# EAGLE board LedBoardPanel (EAGLE 6.4)
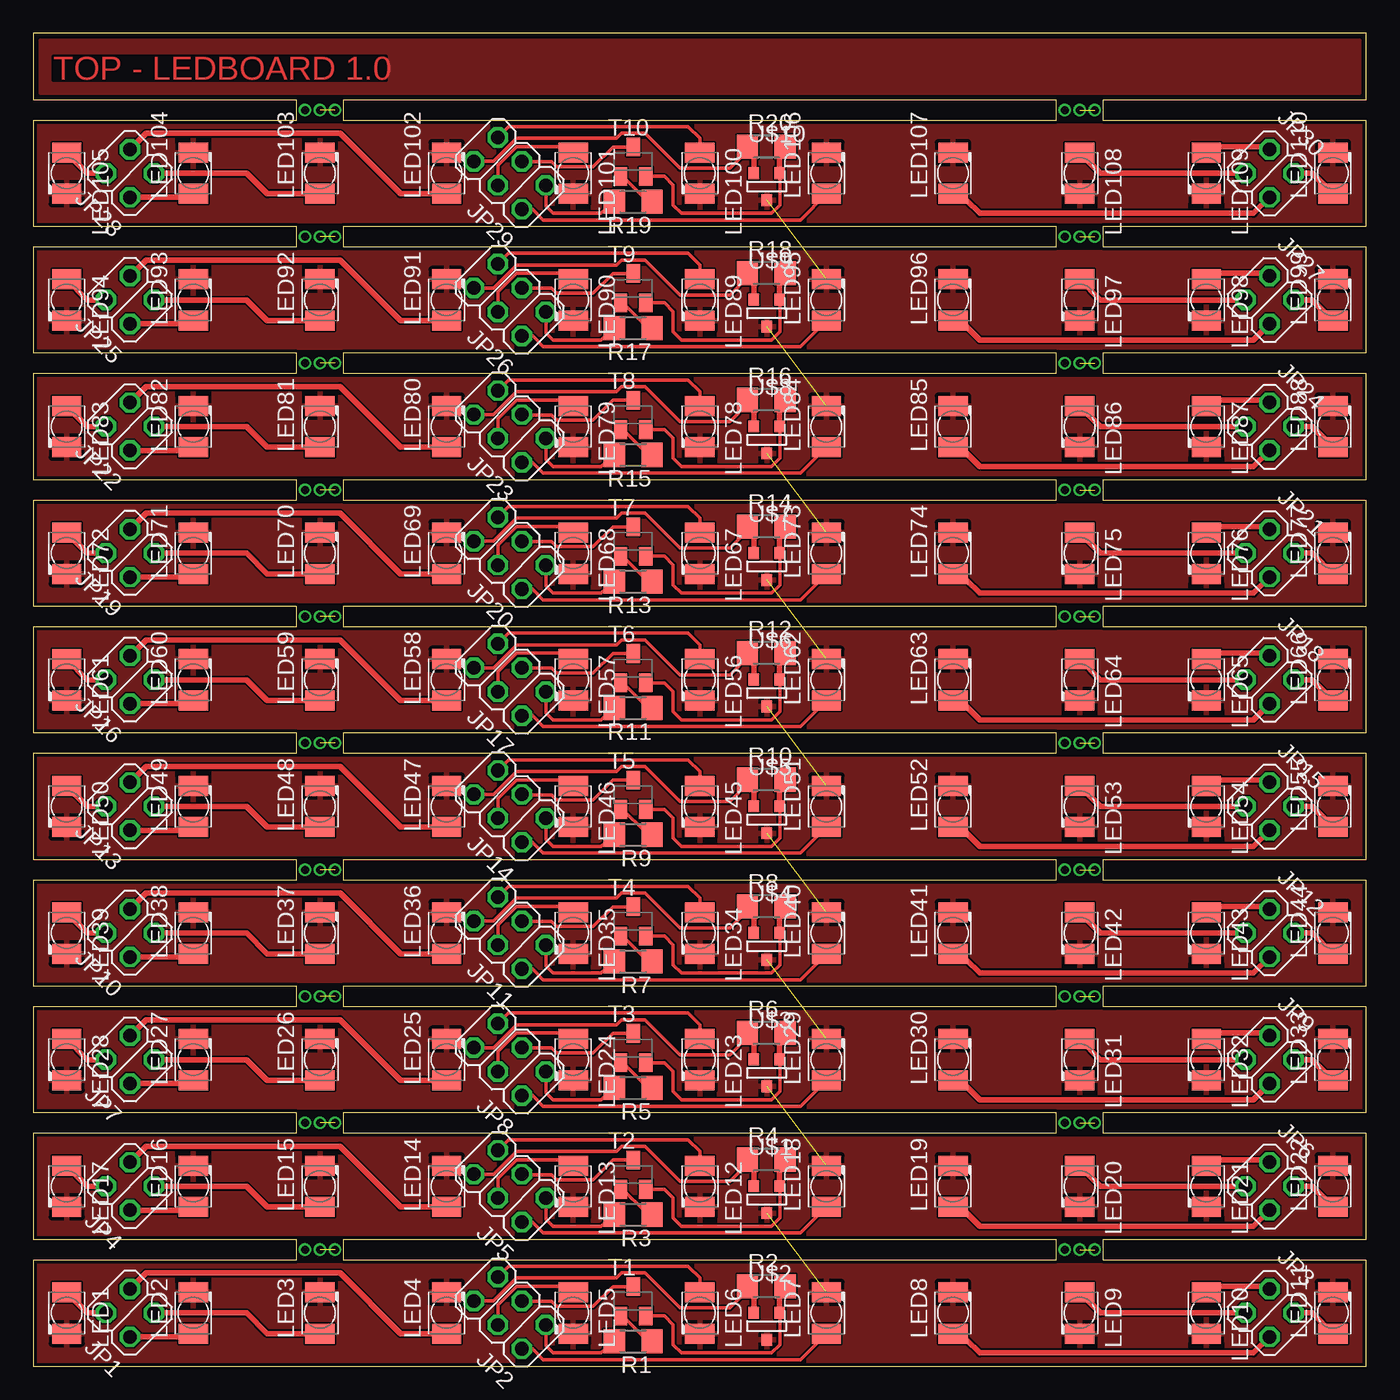
[diagram p0: board, top side]

Size 100 x 100 mm. Coordinates in mm from the lower left corner, seen from the top.
Outline: 0,0 100,0 100,8 80.25,8 80.25,9.5 100,9.5 100,17.5 80.25,17.5 80.25,19 100,19 100,27 80.25,27 80.25,28.5 100,28.5 100,36.5 80.25,36.5 80.25,38 100,38 100,46 80.25,46 80.25,47.5 100,47.5 100,55.5 80.25,55.5 80.25,57 100,57 100,65 80.25,65 80.25,66.5 100,66.5 100,74.5 80.25,74.5 80.25,76 100,76 100,84 80.25,84 80.25,85.5 100,85.5 100,93.5 80.25,93.5 80.25,95 100,95 100,100 0,100 0,95 19.75,95 19.75,93.5 0,93.5 0,85.5 19.75,85.5 19.75,84 0,84 0,76 19.75,76 19.75,74.5 0,74.5 0,66.5 19.75,66.5 19.75,65 0,65 0,57 19.75,57 19.75,55.5 0,55.5 0,47.5 19.75,47.5 19.75,46 0,46 0,38 19.75,38 19.75,36.5 0,36.5 0,28.5 19.75,28.5 19.75,27 0,27 0,19 19.75,19 19.75,17.5 0,17.5 0,9.5 19.75,9.5 19.75,8 0,8 0,0
Outline: 23.25,9.5 23.25,8 76.75,8 76.75,9.5 23.25,9.5
Outline: 23.25,19 23.25,17.5 76.75,17.5 76.75,19 23.25,19
Outline: 23.25,28.5 23.25,27 76.75,27 76.75,28.5 23.25,28.5
Outline: 23.25,38 23.25,36.5 76.75,36.5 76.75,38 23.25,38
Outline: 23.25,47.5 23.25,46 76.75,46 76.75,47.5 23.25,47.5
Outline: 23.25,57 23.25,55.5 76.75,55.5 76.75,57 23.25,57
Outline: 23.25,66.5 23.25,65 76.75,65 76.75,66.5 23.25,66.5
Outline: 23.25,76 23.25,74.5 76.75,74.5 76.75,76 23.25,76
Outline: 23.25,85.5 23.25,84 76.75,84 76.75,85.5 23.25,85.5
Outline: 23.25,95 23.25,93.5 76.75,93.5 76.75,95 23.25,95
Copper layers (1*16): Top 0.035mm / dielectric 1.5mm / Bottom 0.035mm
Design rules "dirt_cheap_dirty_boards.v1": minimum track width 5mil, minimum drill 12mil, track to track 5mil, track to pad 5mil, pad to pad 5mil, via to via 5mil, smd to smd 0mil, copper to edge 10mil, drill to drill 10mil, minimum pad ring 10mil, minimum via ring 6mil, stop-mask expansion 2mil, vias tented up to drill 25mil, thermal gap 10mil
tRestrict: area 19.5,7.9 to 23.5,9.6; area 76.5,7.9 to 80.5,9.6; area 19.5,17.4 to 23.5,19.1; area 76.5,17.4 to 80.5,19.1; area 19.5,26.9 to 23.5,28.6; area 76.5,26.9 to 80.5,28.6; area 19.5,36.4 to 23.5,38.1; area 76.5,36.4 to 80.5,38.1; area 19.5,45.9 to 23.5,47.6; area 76.5,45.9 to 80.5,47.6; area 19.5,55.4 to 23.5,57.1; area 76.5,55.4 to 80.5,57.1; area 19.5,64.9 to 23.5,66.6; area 76.5,64.9 to 80.5,66.6; area 19.5,74.4 to 23.5,76.1; area 76.5,74.4 to 80.5,76.1; area 19.5,83.9 to 23.5,85.6; area 76.5,83.9 to 80.5,85.6; area 19.5,93.4 to 23.5,95.1; area 76.5,93.4 to 80.5,95.1

## Footprints (pad centres in the part's own frame; a part is rotated, then mirrored left to right if it is on the bottom)
2X02 = drill 1.016 octagon: 1 -1.27,-1.27; 2 -1.27,1.27; 3 1.27,-1.27; 4 1.27,1.27
2X03 = drill 1.016 octagon: 1 -2.54,-1.27; 2 -2.54,1.27; 3 0,-1.27; 4 0,1.27; 5 2.54,-1.27; 6 2.54,1.27
KA-3528ASYC = smd 1.5 x 2.2: A -1.55,0; C 1.55,0
R1206 = smd 1.6 x 1.803: 1 -1.422,0; 2 1.422,0
SOT23-BEC = smd 1 x 1.4: B -0.95,-1.1; C 0,1.1; E 0.95,-1.1
SOT-23 = smd 0.787 x 0.889: 1 0.991,1.016; 2 -0.94,1.016; 3 0.025,-1.016

## Placement (x,y rotation side)
JP1  [2X02]  7.25,4 135 top
JP2  [2X03]  35.75,4 135 top
JP3  [2X02]  92.75,4 315 top
JP4  [2X02]  7.25,13.5 135 top
JP5  [2X03]  35.75,13.5 135 top
JP6  [2X02]  92.75,13.5 315 top
JP7  [2X02]  7.25,23 135 top
JP8  [2X03]  35.75,23 135 top
JP9  [2X02]  92.75,23 315 top
JP10  [2X02]  7.25,32.5 135 top
JP11  [2X03]  35.75,32.5 135 top
JP12  [2X02]  92.75,32.5 315 top
JP13  [2X02]  7.25,42 135 top
JP14  [2X03]  35.75,42 135 top
JP15  [2X02]  92.75,42 315 top
JP16  [2X02]  7.25,51.5 135 top
JP17  [2X03]  35.75,51.5 135 top
JP18  [2X02]  92.75,51.5 315 top
JP19  [2X02]  7.25,61 135 top
JP20  [2X03]  35.75,61 135 top
JP21  [2X02]  92.75,61 315 top
JP22  [2X02]  7.25,70.5 135 top
JP23  [2X03]  35.75,70.5 135 top
JP24  [2X02]  92.75,70.5 315 top
JP25  [2X02]  7.25,80 135 top
JP26  [2X03]  35.75,80 135 top
JP27  [2X02]  92.75,80 315 top
JP28  [2X02]  7.25,89.5 135 top
JP29  [2X03]  35.75,89.5 135 top
JP30  [2X02]  92.75,89.5 315 top
LED1  [KA-3528ASYC]  2.5,4 270 top
LED2  [KA-3528ASYC]  12,4 90 top
LED3  [KA-3528ASYC]  21.5,4 90 top
LED4  [KA-3528ASYC]  31,4 90 top
LED5  [KA-3528ASYC]  40.5,4 270 top
LED6  [KA-3528ASYC]  50,4 270 top
LED7  [KA-3528ASYC]  59.5,4 90 top
LED8  [KA-3528ASYC]  69,4 90 top
LED9  [KA-3528ASYC]  78.5,4 270 top
LED10  [KA-3528ASYC]  88,4 270 top
LED11  [KA-3528ASYC]  97.5,4 90 top
LED12  [KA-3528ASYC]  50,13.5 270 top
LED13  [KA-3528ASYC]  40.5,13.5 270 top
LED14  [KA-3528ASYC]  31,13.5 90 top
LED15  [KA-3528ASYC]  21.5,13.5 90 top
LED16  [KA-3528ASYC]  12,13.5 90 top
LED17  [KA-3528ASYC]  2.5,13.5 270 top
LED18  [KA-3528ASYC]  59.5,13.5 90 top
LED19  [KA-3528ASYC]  69,13.5 90 top
LED20  [KA-3528ASYC]  78.5,13.5 270 top
LED21  [KA-3528ASYC]  88,13.5 270 top
LED22  [KA-3528ASYC]  97.5,13.5 90 top
LED23  [KA-3528ASYC]  50,23 270 top
LED24  [KA-3528ASYC]  40.5,23 270 top
LED25  [KA-3528ASYC]  31,23 90 top
LED26  [KA-3528ASYC]  21.5,23 90 top
LED27  [KA-3528ASYC]  12,23 90 top
LED28  [KA-3528ASYC]  2.5,23 270 top
LED29  [KA-3528ASYC]  59.5,23 90 top
LED30  [KA-3528ASYC]  69,23 90 top
LED31  [KA-3528ASYC]  78.5,23 270 top
LED32  [KA-3528ASYC]  88,23 270 top
LED33  [KA-3528ASYC]  97.5,23 90 top
LED34  [KA-3528ASYC]  50,32.5 270 top
LED35  [KA-3528ASYC]  40.5,32.5 270 top
LED36  [KA-3528ASYC]  31,32.5 90 top
LED37  [KA-3528ASYC]  21.5,32.5 90 top
LED38  [KA-3528ASYC]  12,32.5 90 top
LED39  [KA-3528ASYC]  2.5,32.5 270 top
LED40  [KA-3528ASYC]  59.5,32.5 90 top
LED41  [KA-3528ASYC]  69,32.5 90 top
LED42  [KA-3528ASYC]  78.5,32.5 270 top
LED43  [KA-3528ASYC]  88,32.5 270 top
LED44  [KA-3528ASYC]  97.5,32.5 90 top
LED45  [KA-3528ASYC]  50,42 270 top
LED46  [KA-3528ASYC]  40.5,42 270 top
LED47  [KA-3528ASYC]  31,42 90 top
LED48  [KA-3528ASYC]  21.5,42 90 top
LED49  [KA-3528ASYC]  12,42 90 top
LED50  [KA-3528ASYC]  2.5,42 270 top
LED51  [KA-3528ASYC]  59.5,42 90 top
LED52  [KA-3528ASYC]  69,42 90 top
LED53  [KA-3528ASYC]  78.5,42 270 top
LED54  [KA-3528ASYC]  88,42 270 top
LED55  [KA-3528ASYC]  97.5,42 90 top
LED56  [KA-3528ASYC]  50,51.5 270 top
LED57  [KA-3528ASYC]  40.5,51.5 270 top
LED58  [KA-3528ASYC]  31,51.5 90 top
LED59  [KA-3528ASYC]  21.5,51.5 90 top
LED60  [KA-3528ASYC]  12,51.5 90 top
LED61  [KA-3528ASYC]  2.5,51.5 270 top
LED62  [KA-3528ASYC]  59.5,51.5 90 top
LED63  [KA-3528ASYC]  69,51.5 90 top
LED64  [KA-3528ASYC]  78.5,51.5 270 top
LED65  [KA-3528ASYC]  88,51.5 270 top
LED66  [KA-3528ASYC]  97.5,51.5 90 top
LED67  [KA-3528ASYC]  50,61 270 top
LED68  [KA-3528ASYC]  40.5,61 270 top
LED69  [KA-3528ASYC]  31,61 90 top
LED70  [KA-3528ASYC]  21.5,61 90 top
LED71  [KA-3528ASYC]  12,61 90 top
LED72  [KA-3528ASYC]  2.5,61 270 top
LED73  [KA-3528ASYC]  59.5,61 90 top
LED74  [KA-3528ASYC]  69,61 90 top
LED75  [KA-3528ASYC]  78.5,61 270 top
LED76  [KA-3528ASYC]  88,61 270 top
LED77  [KA-3528ASYC]  97.5,61 90 top
LED78  [KA-3528ASYC]  50,70.5 270 top
LED79  [KA-3528ASYC]  40.5,70.5 270 top
LED80  [KA-3528ASYC]  31,70.5 90 top
LED81  [KA-3528ASYC]  21.5,70.5 90 top
LED82  [KA-3528ASYC]  12,70.5 90 top
LED83  [KA-3528ASYC]  2.5,70.5 270 top
LED84  [KA-3528ASYC]  59.5,70.5 90 top
LED85  [KA-3528ASYC]  69,70.5 90 top
LED86  [KA-3528ASYC]  78.5,70.5 270 top
LED87  [KA-3528ASYC]  88,70.5 270 top
LED88  [KA-3528ASYC]  97.5,70.5 90 top
LED89  [KA-3528ASYC]  50,80 270 top
LED90  [KA-3528ASYC]  40.5,80 270 top
LED91  [KA-3528ASYC]  31,80 90 top
LED92  [KA-3528ASYC]  21.5,80 90 top
LED93  [KA-3528ASYC]  12,80 90 top
LED94  [KA-3528ASYC]  2.5,80 270 top
LED95  [KA-3528ASYC]  59.5,80 90 top
LED96  [KA-3528ASYC]  69,80 90 top
LED97  [KA-3528ASYC]  78.5,80 270 top
LED98  [KA-3528ASYC]  88,80 270 top
LED99  [KA-3528ASYC]  97.5,80 90 top
LED100  [KA-3528ASYC]  50,89.5 270 top
LED101  [KA-3528ASYC]  40.5,89.5 270 top
LED102  [KA-3528ASYC]  31,89.5 90 top
LED103  [KA-3528ASYC]  21.5,89.5 90 top
LED104  [KA-3528ASYC]  12,89.5 90 top
LED105  [KA-3528ASYC]  2.5,89.5 270 top
LED106  [KA-3528ASYC]  59.5,89.5 90 top
LED107  [KA-3528ASYC]  69,89.5 90 top
LED108  [KA-3528ASYC]  78.5,89.5 270 top
LED109  [KA-3528ASYC]  88,89.5 270 top
LED110  [KA-3528ASYC]  97.5,89.5 90 top
R1  10k  [R1206]  45,1.88 180 top
R2  10k  [R1206]  55,6 0 top
R3  10k  [R1206]  45,11.38 180 top
R4  10k  [R1206]  55,15.5 0 top
R5  10k  [R1206]  45,20.88 180 top
R6  10k  [R1206]  55,25 0 top
R7  10k  [R1206]  45,30.38 180 top
R8  10k  [R1206]  55,34.5 0 top
R9  10k  [R1206]  45,39.88 180 top
R10  10k  [R1206]  55,44 0 top
R11  10k  [R1206]  45,49.38 180 top
R12  10k  [R1206]  55,53.5 0 top
R13  10k  [R1206]  45,58.88 180 top
R14  10k  [R1206]  55,63 0 top
R15  10k  [R1206]  45,68.38 180 top
R16  10k  [R1206]  55,72.5 0 top
R17  10k  [R1206]  45,77.88 180 top
R18  10k  [R1206]  55,82 0 top
R19  10k  [R1206]  45,87.38 180 top
R20  10k  [R1206]  55,91.5 0 top
T1  [SOT23-BEC]  45,4.88 0 top
T2  [SOT23-BEC]  45,14.38 0 top
T3  [SOT23-BEC]  45,23.88 0 top
T4  [SOT23-BEC]  45,33.38 0 top
T5  [SOT23-BEC]  45,42.88 0 top
T6  [SOT23-BEC]  45,52.38 0 top
T7  [SOT23-BEC]  45,61.88 0 top
T8  [SOT23-BEC]  45,71.38 0 top
T9  [SOT23-BEC]  45,80.88 0 top
T10  [SOT23-BEC]  45,90.38 0 top
U$1  IRLML6402  [SOT-23]  55,12.5 0 top
U$2  IRLML6402  [SOT-23]  55,3 0 top
U$3  IRLML6402  [SOT-23]  55,22 0 top
U$4  IRLML6402  [SOT-23]  55,31.5 0 top
U$5  IRLML6402  [SOT-23]  55,41 0 top
U$6  IRLML6402  [SOT-23]  55,50.5 0 top
U$7  IRLML6402  [SOT-23]  55,60 0 top
U$8  IRLML6402  [SOT-23]  55,69.5 0 top
U$9  IRLML6402  [SOT-23]  55,79 0 top
U$10  IRLML6402  [SOT-23]  55,88.5 0 top

## Library data of the parts
JP1-JP30 = pinhead
LED1-LED110 = led
R1-R20 = resistor
T1-T10 = transistor
U$1-U$10 = IRLML6402

## Nets
GND: LED1.C LED2.C LED3.C LED4.C LED5.C LED6.C LED7.C LED8.C LED9.C LED10.C LED11.C LED12.C LED13.C LED14.C LED15.C LED16.C LED17.C LED18.C LED19.C LED20.C LED21.C LED22.C LED23.C LED24.C LED25.C LED26.C LED27.C LED28.C LED29.C LED30.C LED31.C LED32.C LED33.C LED34.C LED35.C LED36.C LED37.C LED38.C LED39.C LED40.C LED41.C LED42.C LED43.C LED44.C LED45.C LED46.C LED47.C LED48.C LED49.C LED50.C LED51.C LED52.C LED53.C LED54.C LED55.C LED56.C LED57.C LED58.C LED59.C LED60.C LED61.C LED62.C LED63.C LED64.C LED65.C LED66.C LED67.C LED68.C LED69.C LED70.C LED71.C LED72.C LED73.C LED74.C LED75.C LED76.C LED77.C LED78.C LED79.C LED80.C LED81.C LED82.C LED83.C LED84.C LED85.C LED86.C LED87.C LED88.C LED89.C LED90.C LED91.C LED92.C LED93.C LED94.C LED95.C LED96.C LED97.C LED98.C LED99.C LED100.C LED101.C LED102.C LED103.C LED104.C LED105.C LED106.C LED107.C LED108.C LED109.C LED110.C U$1.3 U$2.3 U$3.3 U$4.3 U$5.3 U$6.3 U$7.3 U$8.3 U$9.3 U$10.3
GND_TRANS: JP2.3 T1.C
GND_TRANS1: JP5.3 T2.C
GND_TRANS2: JP8.3 T3.C
GND_TRANS3: JP11.3 T4.C
GND_TRANS4: JP14.3 T5.C
GND_TRANS5: JP17.3 T6.C
GND_TRANS6: JP20.3 T7.C
GND_TRANS7: JP23.3 T8.C
GND_TRANS8: JP26.3 T9.C
GND_TRANS9: JP29.3 T10.C
N$1: JP1.4 LED1.A
N$2: R2.2 T1.E U$2.1
N$3: JP1.2 LED2.A
N$4: JP1.1 LED3.A
N$5: JP1.3 LED4.A
N$6: JP2.4 LED5.A
N$7: JP2.5 LED6.A
N$8: JP3.4 LED11.A
N$9: JP2.6 R2.1 U$2.2
N$10: R1.1 T1.B
N$11: JP3.2 LED10.A
N$12: JP3.1 LED9.A
N$13: JP3.3 LED8.A
N$14: JP2.2 LED7.A
N$15: JP2.1 R1.2
N$16: R4.2 T2.E U$1.1
N$17: R3.1 T2.B
N$18: JP5.1 R3.2
N$19: JP5.6 R4.1 U$1.2
N$20: JP4.4 LED17.A
N$21: JP4.2 LED16.A
N$22: JP4.1 LED15.A
N$23: JP4.3 LED14.A
N$24: JP5.4 LED13.A
N$25: JP5.5 LED12.A
N$26: JP6.4 LED22.A
N$27: JP6.2 LED21.A
N$28: JP6.1 LED20.A
N$29: JP6.3 LED19.A
N$30: JP5.2 LED18.A
N$31: R6.2 T3.E U$3.1
N$32: R5.1 T3.B
N$33: JP8.1 R5.2
N$34: JP8.6 R6.1 U$3.2
N$35: JP7.4 LED28.A
N$36: JP7.2 LED27.A
N$37: JP7.1 LED26.A
N$38: JP7.3 LED25.A
N$39: JP8.4 LED24.A
N$40: JP8.5 LED23.A
N$41: JP9.4 LED33.A
N$42: JP9.2 LED32.A
N$43: JP9.1 LED31.A
N$44: JP9.3 LED30.A
N$45: JP8.2 LED29.A
N$46: R8.2 T4.E U$4.1
N$47: R7.1 T4.B
N$48: JP11.1 R7.2
N$49: JP11.6 R8.1 U$4.2
N$50: JP10.4 LED39.A
N$51: JP10.2 LED38.A
N$52: JP10.1 LED37.A
N$53: JP10.3 LED36.A
N$54: JP11.4 LED35.A
N$55: JP11.5 LED34.A
N$56: JP12.4 LED44.A
N$57: JP12.2 LED43.A
N$58: JP12.1 LED42.A
N$59: JP12.3 LED41.A
N$60: JP11.2 LED40.A
N$61: R10.2 T5.E U$5.1
N$62: R9.1 T5.B
N$63: JP14.1 R9.2
N$64: JP14.6 R10.1 U$5.2
N$65: JP13.4 LED50.A
N$66: JP13.2 LED49.A
N$67: JP13.1 LED48.A
N$68: JP13.3 LED47.A
N$69: JP14.4 LED46.A
N$70: JP14.5 LED45.A
N$71: JP15.4 LED55.A
N$72: JP15.2 LED54.A
N$73: JP15.1 LED53.A
N$74: JP15.3 LED52.A
N$75: JP14.2 LED51.A
N$76: R12.2 T6.E U$6.1
N$77: R11.1 T6.B
N$78: JP17.1 R11.2
N$79: JP17.6 R12.1 U$6.2
N$80: JP16.4 LED61.A
N$81: JP16.2 LED60.A
N$82: JP16.1 LED59.A
N$83: JP16.3 LED58.A
N$84: JP17.4 LED57.A
N$85: JP17.5 LED56.A
N$86: JP18.4 LED66.A
N$87: JP18.2 LED65.A
N$88: JP18.1 LED64.A
N$89: JP18.3 LED63.A
N$90: JP17.2 LED62.A
N$91: R14.2 T7.E U$7.1
N$92: R13.1 T7.B
N$93: JP20.1 R13.2
N$94: JP20.6 R14.1 U$7.2
N$95: JP19.4 LED72.A
N$96: JP19.2 LED71.A
N$97: JP19.1 LED70.A
N$98: JP19.3 LED69.A
N$99: JP20.4 LED68.A
N$100: JP20.5 LED67.A
N$101: JP21.4 LED77.A
N$102: JP21.2 LED76.A
N$103: JP21.1 LED75.A
N$104: JP21.3 LED74.A
N$105: JP20.2 LED73.A
N$106: R16.2 T8.E U$8.1
N$107: R15.1 T8.B
N$108: JP23.1 R15.2
N$109: JP23.6 R16.1 U$8.2
N$110: JP22.4 LED83.A
N$111: JP22.2 LED82.A
N$112: JP22.1 LED81.A
N$113: JP22.3 LED80.A
N$114: JP23.4 LED79.A
N$115: JP23.5 LED78.A
N$116: JP24.4 LED88.A
N$117: JP24.2 LED87.A
N$118: JP24.1 LED86.A
N$119: JP24.3 LED85.A
N$120: JP23.2 LED84.A
N$121: R18.2 T9.E U$9.1
N$122: R17.1 T9.B
N$123: JP26.1 R17.2
N$124: JP26.6 R18.1 U$9.2
N$125: JP25.4 LED94.A
N$126: JP25.2 LED93.A
N$127: JP25.1 LED92.A
N$128: JP25.3 LED91.A
N$129: JP26.4 LED90.A
N$130: JP26.5 LED89.A
N$131: JP27.4 LED99.A
N$132: JP27.2 LED98.A
N$133: JP27.1 LED97.A
N$134: JP27.3 LED96.A
N$135: JP26.2 LED95.A
N$136: R20.2 T10.E U$10.1
N$137: R19.1 T10.B
N$138: JP29.1 R19.2
N$139: JP29.6 R20.1 U$10.2
N$140: JP28.4 LED105.A
N$141: JP28.2 LED104.A
N$142: JP28.1 LED103.A
N$143: JP28.3 LED102.A
N$144: JP29.4 LED101.A
N$145: JP29.5 LED100.A
N$146: JP30.4 LED110.A
N$147: JP30.2 LED109.A
N$148: JP30.1 LED108.A
N$149: JP30.3 LED107.A
N$150: JP29.2 LED106.A

## Tracks (layer width: path | path; a pad name or v marks a point on that pad's centre or on a via)
GND  (9 unrouted)
  pour Top: 100.5,94 -1.5,94 -1.25,-2 100.75,-2
GND_TRANS
  Top 0.254: T1.C 43.48,5.97 42,4.5 39.25,4.5 38.88,4.88 36.88,4.88 JP2.3
GND_TRANS1
  Top 0.254: T2.C 43.48,15.47 42,14 39.25,14 38.88,14.38 36.88,14.38 JP5.3
GND_TRANS2
  Top 0.254: T3.C 43.48,24.98 42,23.5 39.25,23.5 38.88,23.88 36.88,23.88 JP8.3
GND_TRANS3
  Top 0.254: T4.C 43.48,34.48 42,33 39.25,33 38.88,33.38 36.88,33.38 JP11.3
GND_TRANS4
  Top 0.254: T5.C 43.48,43.98 42,42.5 39.25,42.5 38.88,42.88 36.88,42.88 JP14.3
GND_TRANS5
  Top 0.254: T6.C 43.48,53.48 42,52 39.25,52 38.88,52.38 36.88,52.38 JP17.3
GND_TRANS6
  Top 0.254: T7.C 43.48,62.98 42,61.5 39.25,61.5 38.88,61.88 36.88,61.88 JP20.3
GND_TRANS7
  Top 0.254: T8.C 43.48,72.47 42,71 39.25,71 38.88,71.38 36.88,71.38 JP23.3
GND_TRANS8
  Top 0.254: T9.C 43.48,81.97 42,80.5 39.25,80.5 38.88,80.88 36.88,80.88 JP26.3
GND_TRANS9
  Top 0.254: T10.C 43.48,91.47 42,90 39.25,90 38.88,90.38 36.88,90.38 JP29.3
N$1
  Top 0.406: JP1.4 4.05,4 LED1.A
N$2
  Top 0.254: T1.E 47.35,3.77 48,3.12 48,1.62 48.62,1 55.38,1 56,1.62 56,4.01
  Top 0.406: R2.2 55.99,5.57 U$2.1 56,4.01
N$3
  Top 0.406: JP1.2 11.75,2.2 LED2.A
N$4
  Top 0.406: LED3.A 17.55,2.45 16,4 JP1.1
N$5
  Top 0.406: LED4.A 27.55,2.45 23,7 8.46,7 JP1.3
N$6
  Top 0.254: JP2.4 34.85,4.6 36.25,6 40.05,6 LED5.A
  Top 0.406: 39.7,5.75 LED5.A
N$7
  Top 0.254: JP2.5 35.66,7.5 49.12,7.5 50,6.62 LED6.A
N$8
  Top 0.406: 97.98,2.73 98.26,2.45 LED11.A 95.95,4 JP3.4
N$9
  Top 0.254: 53.62,6.05 R2.1 53.58,5.7 52.25,4.38 48.5,4.38 45.88,7 44.12,7 43.75,6.62 36.25,6.62 34.52,4.9 JP2.6
  Top 0.406: U$2.2 54.06,5.52 R2.1
N$10
  Top 0.254: T1.B 44.1,3.9 46,2
  Top 0.406: 45.95,2 46,2 R1.1
N$11
  Top 0.406: LED10.A 89,6 92.55,6 JP3.2
N$12
  Top 0.406: JP3.1 80.05,4 LED9.A
N$13
  Top 0.406: LED8.A 70,2 71,1 91.55,1 JP3.3
N$14
  Top 0.254: 36.69,1.31 37.44,1.31 38.25,0.5 57.55,0.5 LED7.A
  Top 0.406: 36.69,1.31 JP2.2
N$15
  Top 0.254: 43,2.05 R1.2 42.58,1 39,1 38.48,1.52 38.48,3.1 JP2.1
  Top 0.406: 43,2 R1.2
N$16
  Top 0.254: T2.E 47.35,13.28 48,12.62 48,11.12 48.62,10.5 55.38,10.5 56,11.12 56,13.51
  Top 0.406: R4.2 55.99,15.07 U$1.1 56,13.51
N$17
  Top 0.254: T2.B 44.1,13.4 46,11.5
  Top 0.406: 45.95,11.5 46,11.5 R3.1
N$18
  Top 0.254: 43,11.55 R3.2 42.58,10.5 39,10.5 38.48,11.02 38.48,12.6 JP5.1
  Top 0.406: 43,11.5 R3.2
N$19
  Top 0.254: 53.62,15.55 R4.1 53.58,15.2 52.25,13.88 48.5,13.88 45.88,16.5 44.12,16.5 43.75,16.12 36.25,16.12 34.52,14.4 JP5.6
  Top 0.406: U$1.2 54.06,15.02 R4.1
N$20
  Top 0.406: JP4.4 4.05,13.5 LED17.A
N$21
  Top 0.406: JP4.2 11.75,11.7 LED16.A
N$22
  Top 0.406: LED15.A 17.55,11.95 16,13.5 JP4.1
N$23
  Top 0.406: LED14.A 27.55,11.95 23,16.5 8.46,16.5 JP4.3
N$24
  Top 0.254: JP5.4 34.85,14.1 36.25,15.5 40.05,15.5 LED13.A
  Top 0.406: 39.7,15.25 LED13.A
N$25
  Top 0.254: JP5.5 35.66,17 49.12,17 50,16.12 LED12.A
N$26
  Top 0.406: 97.98,12.23 98.26,11.95 LED22.A 95.95,13.5 JP6.4
N$27
  Top 0.406: LED21.A 89,15.5 92.55,15.5 JP6.2
N$28
  Top 0.406: JP6.1 80.05,13.5 LED20.A
N$29
  Top 0.406: LED19.A 70,11.5 71,10.5 91.55,10.5 JP6.3
N$30
  Top 0.254: 36.69,10.81 37.44,10.81 38.25,10 57.55,10 LED18.A
  Top 0.406: 36.69,10.81 JP5.2
N$31
  Top 0.254: T3.E 47.35,22.77 48,22.12 48,20.62 48.62,20 55.38,20 56,20.62 56,23.01
  Top 0.406: R6.2 55.99,24.57 U$3.1 56,23.01
N$32
  Top 0.254: T3.B 44.1,22.9 46,21
  Top 0.406: 45.95,21 46,21 R5.1
N$33
  Top 0.254: 43,21.05 R5.2 42.58,20 39,20 38.48,20.52 38.48,22.1 JP8.1
  Top 0.406: 43,21 R5.2
N$34
  Top 0.254: 53.62,25.05 R6.1 53.58,24.7 52.25,23.38 48.5,23.38 45.88,26 44.12,26 43.75,25.62 36.25,25.62 34.52,23.9 JP8.6
  Top 0.406: U$3.2 54.06,24.52 R6.1
N$35
  Top 0.406: JP7.4 4.05,23 LED28.A
N$36
  Top 0.406: JP7.2 11.75,21.2 LED27.A
N$37
  Top 0.406: LED26.A 17.55,21.45 16,23 JP7.1
N$38
  Top 0.406: LED25.A 27.55,21.45 23,26 8.46,26 JP7.3
N$39
  Top 0.254: JP8.4 34.85,23.6 36.25,25 40.05,25 LED24.A
  Top 0.406: 39.7,24.75 LED24.A
N$40
  Top 0.254: JP8.5 35.66,26.5 49.12,26.5 50,25.62 LED23.A
N$41
  Top 0.406: 97.98,21.73 98.26,21.45 LED33.A 95.95,23 JP9.4
N$42
  Top 0.406: LED32.A 89,25 92.55,25 JP9.2
N$43
  Top 0.406: JP9.1 80.05,23 LED31.A
N$44
  Top 0.406: LED30.A 70,21 71,20 91.55,20 JP9.3
N$45
  Top 0.254: 36.69,20.31 37.44,20.31 38.25,19.5 57.55,19.5 LED29.A
  Top 0.406: 36.69,20.31 JP8.2
N$46
  Top 0.254: T4.E 47.35,32.27 48,31.62 48,30.12 48.62,29.5 55.38,29.5 56,30.12 56,32.51
  Top 0.406: R8.2 55.99,34.07 U$4.1 56,32.51
N$47
  Top 0.254: T4.B 44.1,32.4 46,30.5
  Top 0.406: 45.95,30.5 46,30.5 R7.1
N$48
  Top 0.254: 43,30.55 R7.2 42.58,29.5 39,29.5 38.48,30.02 38.48,31.6 JP11.1
  Top 0.406: 43,30.5 R7.2
N$49
  Top 0.254: 53.62,34.55 R8.1 53.58,34.2 52.25,32.88 48.5,32.88 45.88,35.5 44.12,35.5 43.75,35.12 36.25,35.12 34.52,33.4 JP11.6
  Top 0.406: U$4.2 54.06,34.02 R8.1
N$50
  Top 0.406: JP10.4 4.05,32.5 LED39.A
N$51
  Top 0.406: JP10.2 11.75,30.7 LED38.A
N$52
  Top 0.406: LED37.A 17.55,30.95 16,32.5 JP10.1
N$53
  Top 0.406: LED36.A 27.55,30.95 23,35.5 8.46,35.5 JP10.3
N$54
  Top 0.254: JP11.4 34.85,33.1 36.25,34.5 40.05,34.5 LED35.A
  Top 0.406: 39.7,34.25 LED35.A
N$55
  Top 0.254: JP11.5 35.66,36 49.12,36 50,35.12 LED34.A
N$56
  Top 0.406: 97.98,31.23 98.26,30.95 LED44.A 95.95,32.5 JP12.4
N$57
  Top 0.406: LED43.A 89,34.5 92.55,34.5 JP12.2
N$58
  Top 0.406: JP12.1 80.05,32.5 LED42.A
N$59
  Top 0.406: LED41.A 70,30.5 71,29.5 91.55,29.5 JP12.3
N$60
  Top 0.254: 36.69,29.81 37.44,29.81 38.25,29 57.55,29 LED40.A
  Top 0.406: 36.69,29.81 JP11.2
N$61
  Top 0.254: T5.E 47.35,41.77 48,41.12 48,39.62 48.62,39 55.38,39 56,39.62 56,42.01
  Top 0.406: R10.2 55.99,43.57 U$5.1 56,42.01
N$62
  Top 0.254: T5.B 44.1,41.9 46,40
  Top 0.406: 45.95,40 46,40 R9.1
N$63
  Top 0.254: 43,40.05 R9.2 42.58,39 39,39 38.48,39.52 38.48,41.1 JP14.1
  Top 0.406: 43,40 R9.2
N$64
  Top 0.254: 53.62,44.05 R10.1 53.58,43.7 52.25,42.38 48.5,42.38 45.88,45 44.12,45 43.75,44.62 36.25,44.62 34.52,42.9 JP14.6
  Top 0.406: U$5.2 54.06,43.52 R10.1
N$65
  Top 0.406: JP13.4 4.05,42 LED50.A
N$66
  Top 0.406: JP13.2 11.75,40.2 LED49.A
N$67
  Top 0.406: LED48.A 17.55,40.45 16,42 JP13.1
N$68
  Top 0.406: LED47.A 27.55,40.45 23,45 8.46,45 JP13.3
N$69
  Top 0.254: JP14.4 34.85,42.6 36.25,44 40.05,44 LED46.A
  Top 0.406: 39.7,43.75 LED46.A
N$70
  Top 0.254: JP14.5 35.66,45.5 49.12,45.5 50,44.62 LED45.A
N$71
  Top 0.406: 97.98,40.73 98.26,40.45 LED55.A 95.95,42 JP15.4
N$72
  Top 0.406: LED54.A 89,44 92.55,44 JP15.2
N$73
  Top 0.406: JP15.1 80.05,42 LED53.A
N$74
  Top 0.406: LED52.A 70,40 71,39 91.55,39 JP15.3
N$75
  Top 0.254: 36.69,39.31 37.44,39.31 38.25,38.5 57.55,38.5 LED51.A
  Top 0.406: 36.69,39.31 JP14.2
N$76
  Top 0.254: T6.E 47.35,51.27 48,50.62 48,49.12 48.62,48.5 55.38,48.5 56,49.12 56,51.51
  Top 0.406: R12.2 55.99,53.07 U$6.1 56,51.51
N$77
  Top 0.254: T6.B 44.1,51.4 46,49.5
  Top 0.406: 45.95,49.5 46,49.5 R11.1
N$78
  Top 0.254: 43,49.55 R11.2 42.58,48.5 39,48.5 38.48,49.02 38.48,50.6 JP17.1
  Top 0.406: 43,49.5 R11.2
N$79
  Top 0.254: 53.62,53.55 R12.1 53.58,53.2 52.25,51.88 48.5,51.88 45.88,54.5 44.12,54.5 43.75,54.12 36.25,54.12 34.52,52.4 JP17.6
  Top 0.406: U$6.2 54.06,53.02 R12.1
N$80
  Top 0.406: JP16.4 4.05,51.5 LED61.A
N$81
  Top 0.406: JP16.2 11.75,49.7 LED60.A
N$82
  Top 0.406: LED59.A 17.55,49.95 16,51.5 JP16.1
N$83
  Top 0.406: LED58.A 27.55,49.95 23,54.5 8.46,54.5 JP16.3
N$84
  Top 0.254: JP17.4 34.85,52.1 36.25,53.5 40.05,53.5 LED57.A
  Top 0.406: 39.7,53.25 LED57.A
N$85
  Top 0.254: JP17.5 35.66,55 49.12,55 50,54.12 LED56.A
N$86
  Top 0.406: 97.98,50.23 98.26,49.95 LED66.A 95.95,51.5 JP18.4
N$87
  Top 0.406: LED65.A 89,53.5 92.55,53.5 JP18.2
N$88
  Top 0.406: JP18.1 80.05,51.5 LED64.A
N$89
  Top 0.406: LED63.A 70,49.5 71,48.5 91.55,48.5 JP18.3
N$90
  Top 0.254: 36.69,48.81 37.44,48.81 38.25,48 57.55,48 LED62.A
  Top 0.406: 36.69,48.81 JP17.2
N$91
  Top 0.254: T7.E 47.35,60.77 48,60.12 48,58.62 48.62,58 55.38,58 56,58.62 56,61.01
  Top 0.406: R14.2 55.99,62.57 U$7.1 56,61.01
N$92
  Top 0.254: T7.B 44.1,60.9 46,59
  Top 0.406: 45.95,59 46,59 R13.1
N$93
  Top 0.254: 43,59.05 R13.2 42.58,58 39,58 38.48,58.52 38.48,60.1 JP20.1
  Top 0.406: 43,59 R13.2
N$94
  Top 0.254: 53.62,63.05 R14.1 53.58,62.7 52.25,61.38 48.5,61.38 45.88,64 44.12,64 43.75,63.62 36.25,63.62 34.52,61.9 JP20.6
  Top 0.406: U$7.2 54.06,62.52 R14.1
N$95
  Top 0.406: JP19.4 4.05,61 LED72.A
N$96
  Top 0.406: JP19.2 11.75,59.2 LED71.A
N$97
  Top 0.406: LED70.A 17.55,59.45 16,61 JP19.1
N$98
  Top 0.406: LED69.A 27.55,59.45 23,64 8.46,64 JP19.3
N$99
  Top 0.254: JP20.4 34.85,61.6 36.25,63 40.05,63 LED68.A
  Top 0.406: 39.7,62.75 LED68.A
N$100
  Top 0.254: JP20.5 35.66,64.5 49.12,64.5 50,63.62 LED67.A
N$101
  Top 0.406: 97.98,59.73 98.26,59.45 LED77.A 95.95,61 JP21.4
N$102
  Top 0.406: LED76.A 89,63 92.55,63 JP21.2
N$103
  Top 0.406: JP21.1 80.05,61 LED75.A
N$104
  Top 0.406: LED74.A 70,59 71,58 91.55,58 JP21.3
N$105
  Top 0.254: 36.69,58.31 37.44,58.31 38.25,57.5 57.55,57.5 LED73.A
  Top 0.406: 36.69,58.31 JP20.2
N$106
  Top 0.254: T8.E 47.35,70.28 48,69.62 48,68.12 48.62,67.5 55.38,67.5 56,68.12 56,70.51
  Top 0.406: R16.2 55.99,72.07 U$8.1 56,70.51
N$107
  Top 0.254: T8.B 44.1,70.4 46,68.5
  Top 0.406: 45.95,68.5 46,68.5 R15.1
N$108
  Top 0.254: 43,68.55 R15.2 42.58,67.5 39,67.5 38.48,68.02 38.48,69.6 JP23.1
  Top 0.406: 43,68.5 R15.2
N$109
  Top 0.254: 53.62,72.55 R16.1 53.58,72.2 52.25,70.88 48.5,70.88 45.88,73.5 44.12,73.5 43.75,73.12 36.25,73.12 34.52,71.4 JP23.6
  Top 0.406: U$8.2 54.06,72.02 R16.1
N$110
  Top 0.406: JP22.4 4.05,70.5 LED83.A
N$111
  Top 0.406: JP22.2 11.75,68.7 LED82.A
N$112
  Top 0.406: LED81.A 17.55,68.95 16,70.5 JP22.1
N$113
  Top 0.406: LED80.A 27.55,68.95 23,73.5 8.46,73.5 JP22.3
N$114
  Top 0.254: JP23.4 34.85,71.1 36.25,72.5 40.05,72.5 LED79.A
  Top 0.406: 39.7,72.25 LED79.A
N$115
  Top 0.254: JP23.5 35.66,74 49.12,74 50,73.12 LED78.A
N$116
  Top 0.406: 97.98,69.23 98.26,68.95 LED88.A 95.95,70.5 JP24.4
N$117
  Top 0.406: LED87.A 89,72.5 92.55,72.5 JP24.2
N$118
  Top 0.406: JP24.1 80.05,70.5 LED86.A
N$119
  Top 0.406: LED85.A 70,68.5 71,67.5 91.55,67.5 JP24.3
N$120
  Top 0.254: 36.69,67.81 37.44,67.81 38.25,67 57.55,67 LED84.A
  Top 0.406: 36.69,67.81 JP23.2
N$121
  Top 0.254: T9.E 47.35,79.78 48,79.12 48,77.62 48.62,77 55.38,77 56,77.62 56,80.01
  Top 0.406: R18.2 55.99,81.57 U$9.1 56,80.01
N$122
  Top 0.254: T9.B 44.1,79.9 46,78
  Top 0.406: 45.95,78 46,78 R17.1
N$123
  Top 0.254: 43,78.05 R17.2 42.58,77 39,77 38.48,77.52 38.48,79.1 JP26.1
  Top 0.406: 43,78 R17.2
N$124
  Top 0.254: 53.62,82.05 R18.1 53.58,81.7 52.25,80.38 48.5,80.38 45.88,83 44.12,83 43.75,82.62 36.25,82.62 34.52,80.9 JP26.6
  Top 0.406: U$9.2 54.06,81.52 R18.1
N$125
  Top 0.406: JP25.4 4.05,80 LED94.A
N$126
  Top 0.406: JP25.2 11.75,78.2 LED93.A
N$127
  Top 0.406: LED92.A 17.55,78.45 16,80 JP25.1
N$128
  Top 0.406: LED91.A 27.55,78.45 23,83 8.46,83 JP25.3
N$129
  Top 0.254: JP26.4 34.85,80.6 36.25,82 40.05,82 LED90.A
  Top 0.406: 39.7,81.75 LED90.A
N$130
  Top 0.254: JP26.5 35.66,83.5 49.12,83.5 50,82.62 LED89.A
N$131
  Top 0.406: 97.98,78.73 98.26,78.45 LED99.A 95.95,80 JP27.4
N$132
  Top 0.406: LED98.A 89,82 92.55,82 JP27.2
N$133
  Top 0.406: JP27.1 80.05,80 LED97.A
N$134
  Top 0.406: LED96.A 70,78 71,77 91.55,77 JP27.3
N$135
  Top 0.254: 36.69,77.31 37.44,77.31 38.25,76.5 57.55,76.5 LED95.A
  Top 0.406: 36.69,77.31 JP26.2
N$136
  Top 0.254: T10.E 47.35,89.28 48,88.62 48,87.12 48.62,86.5 55.38,86.5 56,87.12 56,89.51
  Top 0.406: R20.2 55.99,91.07 U$10.1 56,89.51
N$137
  Top 0.254: T10.B 44.1,89.4 46,87.5
  Top 0.406: 45.95,87.5 46,87.5 R19.1
N$138
  Top 0.254: 43,87.55 R19.2 42.58,86.5 39,86.5 38.48,87.02 38.48,88.6 JP29.1
  Top 0.406: 43,87.5 R19.2
N$139
  Top 0.254: 53.62,91.55 R20.1 53.58,91.2 52.25,89.88 48.5,89.88 45.88,92.5 44.12,92.5 43.75,92.12 36.25,92.12 34.52,90.4 JP29.6
  Top 0.406: U$10.2 54.06,91.02 R20.1
N$140
  Top 0.406: JP28.4 4.05,89.5 LED105.A
N$141
  Top 0.406: JP28.2 11.75,87.7 LED104.A
N$142
  Top 0.406: LED103.A 17.55,87.95 16,89.5 JP28.1
N$143
  Top 0.406: LED102.A 27.55,87.95 23,92.5 8.46,92.5 JP28.3
N$144
  Top 0.254: JP29.4 34.85,90.1 36.25,91.5 40.05,91.5 LED101.A
  Top 0.406: 39.7,91.25 LED101.A
N$145
  Top 0.254: JP29.5 35.66,93 49.12,93 50,92.12 LED100.A
N$146
  Top 0.406: 97.98,88.23 98.26,87.95 LED110.A 95.95,89.5 JP30.4
N$147
  Top 0.406: LED109.A 89,91.5 92.55,91.5 JP30.2
N$148
  Top 0.406: JP30.1 80.05,89.5 LED108.A
N$149
  Top 0.406: LED107.A 70,87.5 71,86.5 91.55,86.5 JP30.3
N$150
  Top 0.254: 36.69,86.81 37.44,86.81 38.25,86 57.55,86 LED106.A
  Top 0.406: 36.69,86.81 JP29.2
S$1  (via drill 0.6)
  other vias: 77.38,8.75
S$2  (via drill 0.6)
  other vias: 20.38,8.75
S$3  (via drill 0.6)  (1 unrouted)
  other vias: 21.5,8.75 22.62,8.75
S$4  (via drill 0.6)  (1 unrouted)
  other vias: 78.5,8.75 79.62,8.75
S$5  (via drill 0.6)
  other vias: 20.38,18.25
S$6  (via drill 0.6)  (1 unrouted)
  other vias: 21.5,18.25 22.62,18.25
S$7  (via drill 0.6)
  other vias: 77.38,18.25
S$8  (via drill 0.6)  (1 unrouted)
  other vias: 78.5,18.25 79.62,18.25
S$9  (via drill 0.6)
  other vias: 20.38,27.75
S$10  (via drill 0.6)  (1 unrouted)
  other vias: 21.5,27.75 22.62,27.75
S$11  (via drill 0.6)
  other vias: 77.38,27.75
S$12  (via drill 0.6)  (1 unrouted)
  other vias: 78.5,27.75 79.62,27.75
S$13  (via drill 0.6)
  other vias: 20.38,37.25
S$14  (via drill 0.6)  (1 unrouted)
  other vias: 21.5,37.25 22.62,37.25
S$15  (via drill 0.6)
  other vias: 77.38,37.25
S$16  (via drill 0.6)  (1 unrouted)
  other vias: 78.5,37.25 79.62,37.25
S$17  (via drill 0.6)
  other vias: 20.38,46.75
S$18  (via drill 0.6)  (1 unrouted)
  other vias: 21.5,46.75 22.62,46.75
S$19  (via drill 0.6)
  other vias: 77.38,46.75
S$20  (via drill 0.6)  (1 unrouted)
  other vias: 78.5,46.75 79.62,46.75
S$21  (via drill 0.6)
  other vias: 20.38,56.25
S$22  (via drill 0.6)  (1 unrouted)
  other vias: 21.5,56.25 22.62,56.25
S$23  (via drill 0.6)
  other vias: 77.38,56.25
S$24  (via drill 0.6)  (1 unrouted)
  other vias: 78.5,56.25 79.62,56.25
S$25  (via drill 0.6)
  other vias: 20.38,65.75
S$26  (via drill 0.6)  (1 unrouted)
  other vias: 21.5,65.75 22.62,65.75
S$27  (via drill 0.6)
  other vias: 77.38,65.75
S$28  (via drill 0.6)  (1 unrouted)
  other vias: 78.5,65.75 79.62,65.75
S$29  (via drill 0.6)
  other vias: 20.38,75.25
S$30  (via drill 0.6)  (1 unrouted)
  other vias: 21.5,75.25 22.62,75.25
S$31  (via drill 0.6)
  other vias: 77.38,75.25
S$32  (via drill 0.6)  (1 unrouted)
  other vias: 78.5,75.25 79.62,75.25
S$33  (via drill 0.6)
  other vias: 20.38,84.75
S$34  (via drill 0.6)  (1 unrouted)
  other vias: 21.5,84.75 22.62,84.75
S$35  (via drill 0.6)
  other vias: 77.38,84.75
S$36  (via drill 0.6)  (1 unrouted)
  other vias: 78.5,84.75 79.62,84.75
S$37  (via drill 0.6)
  other vias: 20.38,94.25
S$38  (via drill 0.6)  (1 unrouted)
  other vias: 21.5,94.25 22.62,94.25
S$39  (via drill 0.6)
  other vias: 77.38,94.25
S$40  (via drill 0.6)  (1 unrouted)
  other vias: 78.5,94.25 79.62,94.25
S$41
  pour Top: 1,99.5 99.5,99.5 99.5,95.5 0.5,95.5 0.5,99.5

## Text on the board
Top: TOP - LEDBOARD 1.0